# Altium PCB pcb.PcbDoc
Units mil, origin at the board's own origin, x right, y up, seen from the top; angles counter-clockwise.
Board outline 4330.71 x 2362.2 mil, 2 copper layers (Top Layer, Bottom Layer); 57 components, 43 nets, 209 pads, 55 vias.
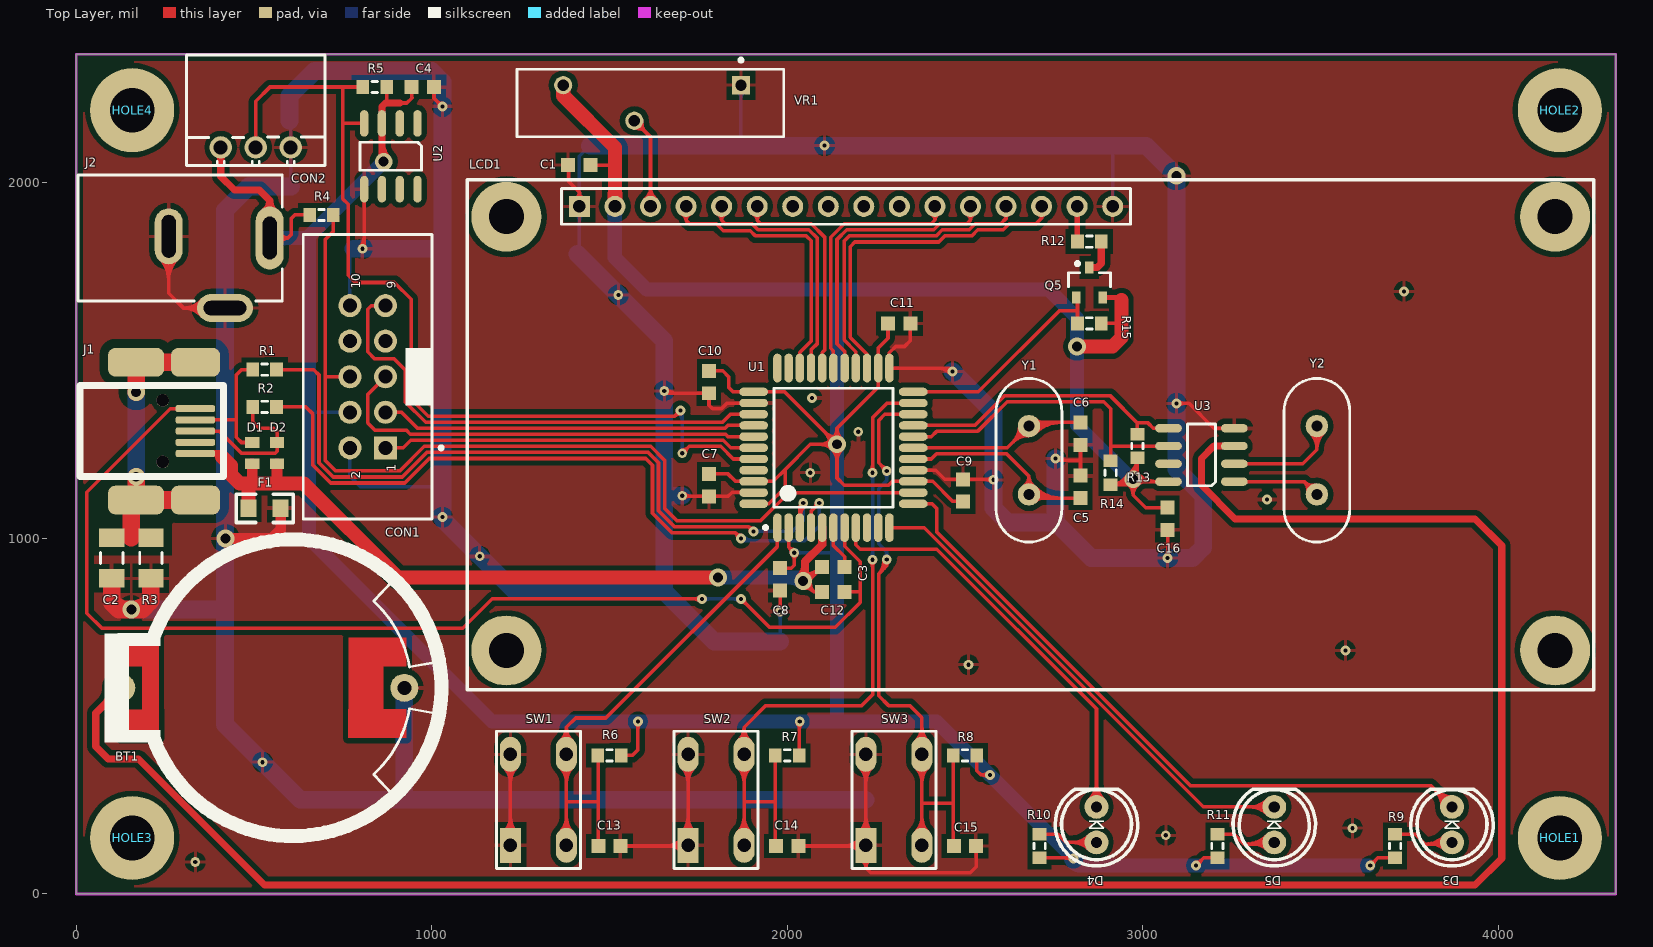
[diagram p0: Top Layer view]
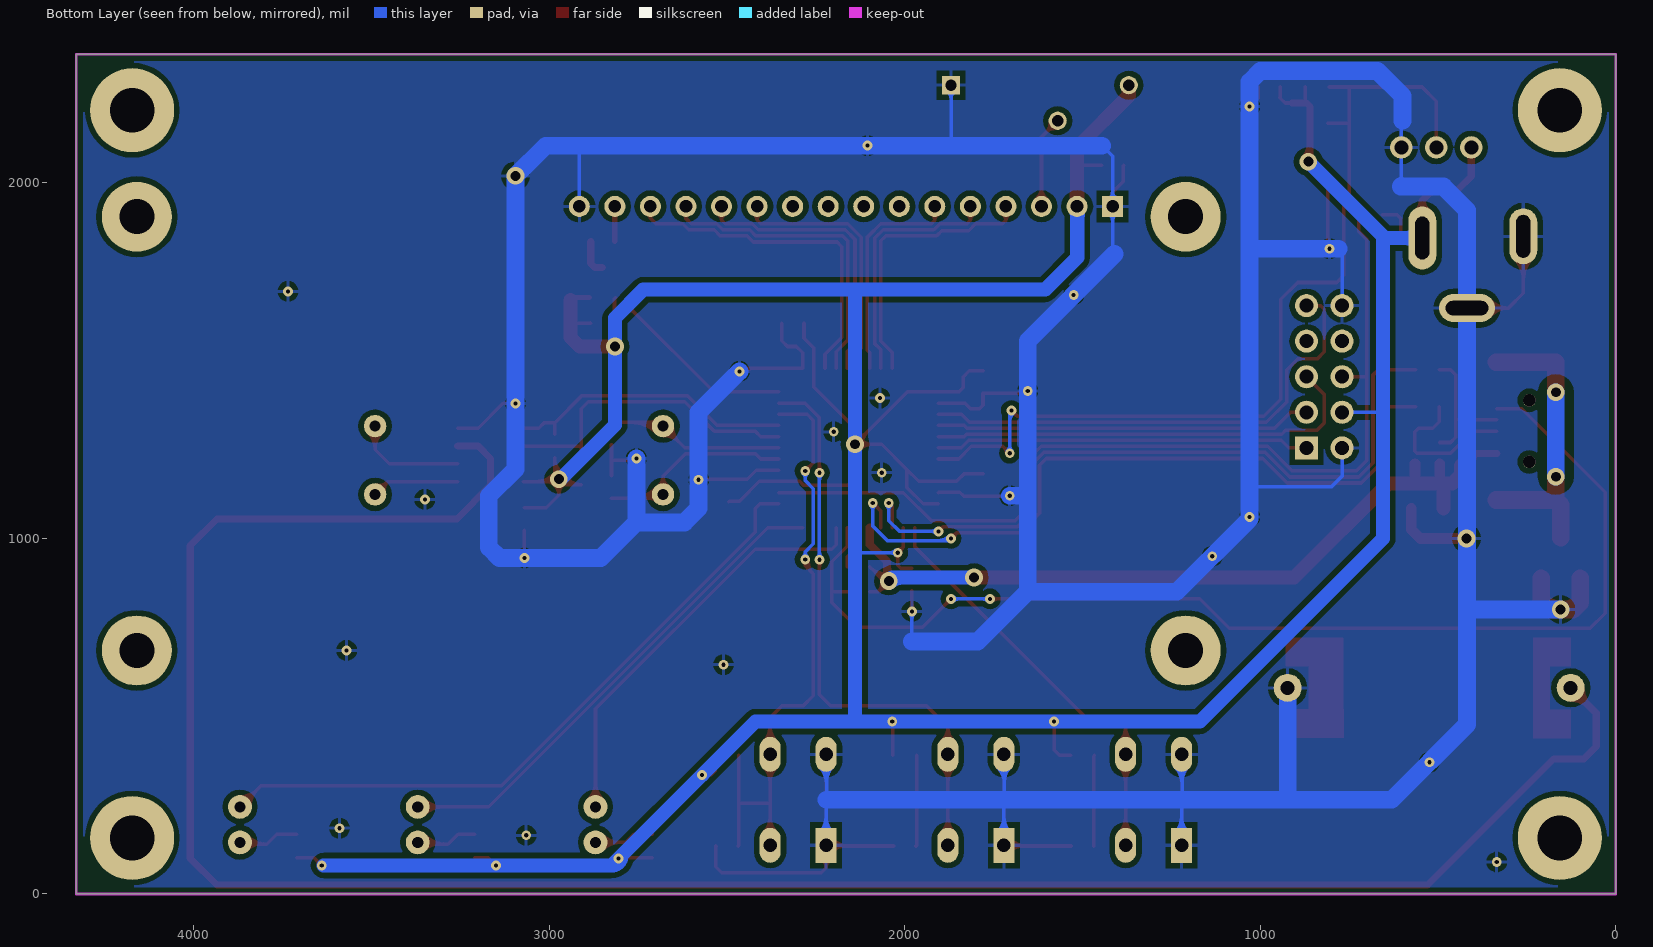
[diagram p1: Bottom Layer view, seen from below]

## Layer stack, top to bottom
Top Solder: solder mask 0.4, Solder Resist, Dk 3.5
Top Layer: signal copper 1.4
Dielectric 1: dielectric 12.6, FR-4, Dk 4.8
Bottom Layer: signal copper 1.4
Bottom Solder: solder mask 0.4, Solder Resist, Dk 3.5

## Board outline
0,0 0,2362.2 4330.71,2362.2 4330.71,0

## Design rules (kind name [scope] priority, off if disabled: settings)
Clearance shield2polygon [InNet('SHIELD')] p1: gap=25
Clearance polygons [InPolygon] p2: gap=15
Clearance [All] p3: gap=7
HoleSize [All] p1: absolutevalues=TRUE maxlimit=300 minlimit=1 maxpercent=80.000 minpercent=20.000
MinimumSolderMaskSliver [All] p1: minsoldermaskwidth=1
PlaneClearance [All] p1: clearance=10
PolygonConnect [All] p1: connectstyle=Relief reliefconductorwidth=10 reliefentries=4 polygonreliefangle="90 Angle" airgapwidth=15
RoutingVias [All] p1: holewidth=28 width=50 viastyle="Through Hole" minholewidth=28 minwidth=50 maxholewidth=28 maxwidth=50
SilkToBoardRegionClearance [All] p1 off:
SilkToSolderMaskClearance [IsPad] p1 off: minsilkscreentomaskgap=1 clearancetoexposedcopper=TRUE
SolderMaskExpansion [All] p1: expansion=4
UnpouredPolygon [All] p1: allowunpoured=FALSE
Width SHIELD [InNet('SHIELD')] p1: maxlimit=70 minlimit=50 preferedwidth=70
Width 12V [InNet('12V')] p2: maxlimit=40 minlimit=10 preferedwidth=30
Width GND [InNet('GND')] p3: maxlimit=70 minlimit=10 preferedwidth=70
Width 5V [InNet('5V')] p4: maxlimit=40 minlimit=10 preferedwidth=35
Width 24V [InNet('24V')] p5: maxlimit=70 minlimit=10 preferedwidth=70
Width [All] p6: maxlimit=40 minlimit=10 preferedwidth=10
24 further rules are at their usual default settings.

## Components (designator, comment, footprint, x,y, rotation, side; value= is the part's Value field where it differs from the comment)
BT1 "120591-1" TECO-120591-1-2_V 610,580 r180 top
C1 "100nF" CAPC1608N 1415,2050 r0 top
C2 "2n2" CAPC3216N 100,945 r90 top
C3 "1uF" CAPC1608N 2130,920 r0 top
C4 "100nF" CAPC1608N 975,2270 r180 top
C5 "15pF" CAPC1608N 2825,1145 r270 top
C6 "15pF" CAPC1608N 2825,1295 r90 top
C7 "100nF" CAPC1608N 1780,1150 r90 top
C8 "100nF" CAPC1608N 1980,885 r90 top
C9 "100nF" CAPC1608N 2495,1135 r270 top
C10 "100nF" CAPC1608N 1780,1440 r90 top
C11 "100nF" CAPC1608N 2315,1605 r180 top
C12 "100nF" CAPC1608N 2130,850 r0 top
C13 "100nF" CAPC1608N 1500,135 r180 top
C14 "100nF" CAPC1608N 2000,135 r180 top
C15 "100nF" CAPC1608N 2500,135 r180 top
C16 "100nF" CAPC1608N 3070,1055 r90 top
CON1 "Header 5X2" 918510X324 820,1455 r90 top
CON2 "MX-5268-03A" MX-5268-03 505,2100 r0 top
D1 "SURGX" SURGX-0603 495,1240 r90 top
D2 "SURGX" SURGX-0603 565,1240 r90 top
D3 "LED_GREEN" "LED 5mm Single Green" 3870,145 r90 top
D4 "LED_YELLOW" "LED 5mm Single Yellow" 2870,145 r90 top
D5 "LED_RED" "LED 5mm Single" 3370,145 r90 top
F1 "0.5A" SR050 575,1085 r180 top
HOLE1 "Mounting Hole" Hole3.2x6mm#1 4170,165 r0 top
HOLE2 "Mounting Hole" Hole3.2x6mm#2 4170,2210 r0 top
HOLE3 "Mounting Hole" Hole3.2x6mm#3 190,175 r0 top
HOLE4 "Mounting Hole" Hole3.2x6mm#4 130,2210 r0 top
J1 "67503-1020" MOLX-67503-1020_V 335,1365 r0 top
J2 "PWR2.5" KLD-0202 5,1845 r0 top
LCD1 "hd44780" HD44780 1100,575 r0 top locked
Q5 "AP2301" SOT95P230-3L 2850,1720 r90 top
R1 "22R" RESC1608N 530,1475 r0 top
R2 "22R" RESC1608N 530,1370 r0 top
R3 "10M" RESC3216N 210,945 r90 top
R4 "47k" RESC1608N 690,1910 r180 top
R5 "4.7k" RESC1608N 840,2270 r180 top
R6 "10k" RESC1608N 1500,390 r180 top
R7 "10k" RESC1608N 2000,390 r180 top
R8 "10k" RESC1608N 2500,390 r180 top
R9 "300R" RESC1608N 3710,135 r270 top
R10 "300R" RESC1608N 2710,135 r270 top
R11 "300R" RESC1608N 3210,135 r270 top
R12 "200R" RESC1608N 2850,1835 r0 top
R13 "2.2k" RESC1608N 2985,1260 r270 top
R14 "2.2k" RESC1608N 2910,1185 r270 top
R15 "3k" RESC1608N 2850,1605 r0 top
SW1 "DTSHW66NB" FSM2J 1300,265 r90 top
SW2 "DTSHW66NB" FSM2J 1800,265 r90 top
SW3 "DTSHW66NB" FSM2J 2300,265 r90 top
U1 "ATmega16U4RC-AU" 44ML_M 2130,1255 r90 top
U2 "DS18B20Z" SO-8_L 885,2075 r270 top
U3 "DS1307ZN+" SO-8_L 3165,1235 r180 top
VR1 "3006P-1-103ZLF" BOUR-3006P-3_V 1615,2225 r180 top
Y1 "16Mhz" HC-49U 2680,1220 r270 top
Y2 "32.768kHz" HC-49U 3490,1220 r90 top

## Footprints (in the part's own frame and the unit in brackets; to place one, negate y for a bottom-side part, rotate by r counter-clockwise, add the part's x,y. Pads: shape width x height; smd on the part's side, far side on the other; paste and mask are expansions set on the pad)
44ML_M [mm] "Thin QFP, 44-Leads, Body 10x10mm, Pitch 0.8mm, IPC Low Density"
  oval 2.05x0.6 smd: 1(-5.7,4) 2(-5.7,3.2) 3(-5.7,2.4) 4(-5.7,1.6) 5(-5.7,0.8) 6(-5.7,0) 7(-5.7,-0.8) 8(-5.7,-1.6) 9(-5.7,-2.4) 10(-5.7,-3.2) 11(-5.7,-4) 23(5.7,-4) 24(5.7,-3.2) 25(5.7,-2.4) 26(5.7,-1.6) 27(5.7,-0.8) 28(5.7,0) 29(5.7,0.8) 30(5.7,1.6) 31(5.7,2.4) 32(5.7,3.2) 33(5.7,4)
  oval 0.6x2.05 smd: 12(-4,-5.7) 13(-3.2,-5.7) 14(-2.4,-5.7) 15(-1.6,-5.7) 16(-0.8,-5.7) 17(0,-5.7) 18(0.8,-5.7) 19(1.6,-5.7) 20(2.4,-5.7) 21(3.2,-5.7) 22(4,-5.7) 34(4,5.7) 35(3.2,5.7) 36(2.4,5.7) 37(1.6,5.7) 38(0.8,5.7) 39(0,5.7) 40(-0.8,5.7) 41(-1.6,5.7) 42(-2.4,5.7) 43(-3.2,5.7) 44(-4,5.7)
  silkscreen extent -5.82,-4.25 4.25,4.97, body extent -6,-6 6,6, height 1.08
918510X324 [mm] "Connector; IDC, Low Profile Male Header, Thru-Hole; 10 Position; Vertical; Pitch 2.54 mm; Body 20.32 x 9.2 x 9.45 mm (LxWxH)"
  rect 1.65x1.65 hole 1: 1(-5.08,-1.27)
  round 1.65 hole 1: 2(-5.08,1.27) 3(-2.54,-1.27) 4(-2.54,1.27) 5(0,-1.27) 6(0,1.27) 7(2.54,-1.27) 8(2.54,1.27) 9(5.08,-1.27) 10(5.08,1.27)
  silkscreen extent -10.16,-5.38 10.16,4.6, body extent -10.16,-4.57 10.16,4.57, height 9.86
BOUR-3006P-3_V [mm] "THD, 3-Leads, Body 19.05x4.83mm, Height 6.6mm"
  rect 1.3x1.3 hole 0.8: 1(-6.475,-1.27)
  round 1.3 hole 0.8: 2(1.145,1.27) 3(6.225,-1.27)
  silkscreen extent -9.53,-3.19 9.53,2.41, body extent -9.53,-2.41 11.05,2.41, height 6.6
CAPC1608N [mm] "Chip Capacitor, Body 1.6x0.8mm, IPC Medium Density"
  rect 1x1 smd: 1(-0.8,0) 2(0.8,0)
  body extent -0.8,-0.4 0.8,0.4, height 0.3
CAPC3216N [mm] "Chip Capacitor, Body 3.2x1.6mm, IPC Medium Density"
  rect 1.3x1.8 smd: 1(-1.45,0) 2(1.45,0)
  silkscreen extent -0.4,-0.8 0.4,0.8, body extent -1.6,-0.84 1.6,0.76, height 1
FSM2J [mm]
  rect 2.5x1.5 hole 0.95: 1(-3.25,2)
  oval 2.5x1.5 hole 0.95: 1(3.25,2) 2(-3.25,-2) 2(3.25,-2)
  silkscreen extent -4.9,-3 4.9,3, body extent -4.13,-3.3 4.13,3.2, height 7
HC-49U [mm] "Quartz Crystal, Thru-Hole; 2 Leads; Body 11.35 x 4.65 x 13.46 mm (LxWxH max)"
  round 1.6 hole 0.8: 1(-2.44,0) 2(2.44,0)
  silkscreen extent -5.85,-2.35 5.85,2.35, body extent -5.67,-2.3 5.68,2.35, height 3.6
HD44780 [mm] "Connector; Header; 16 Position"
  round 5 hole 2.5: 0(2.794,2.794) 0(2.794,33.782) 0(77.724,2.794) 0(77.724,33.782)
  rect 1.5x1.5 hole 0.9: 1(8.013,34.521)
  round 1.5 hole 0.9: 2(10.553,34.521) 3(13.093,34.521) 4(15.633,34.521) 5(18.173,34.521) 6(20.713,34.521) 7(23.253,34.521) 8(25.793,34.521) 9(28.333,34.521) 10(30.873,34.521) 11(33.413,34.521) 12(35.953,34.521) 13(38.493,34.521) 14(41.033,34.521) 15(43.573,34.521) 16(46.113,34.521)
  silkscreen extent 0,0 80.5,36.43, body extent 0,0 80.5,36.5, height 17.52
Hole3.2x6mm#1 [mm] "Mounting Hole"
  round 6 hole 3.2: 0(0.082,-0.191)
  body extent -0.1,-0.1 0.1,0.1
Hole3.2x6mm#2 [mm] "Mounting Hole"
  round 6 hole 3.2: 0(0.082,-0.134)
  body extent -0.1,-0.1 0.1,0.1
Hole3.2x6mm#3 [mm] "Mounting Hole"
  round 6 hole 3.2: 0(-0.826,-0.445)
  body extent -0.1,-0.1 0.1,0.1
Hole3.2x6mm#4 [mm] "Mounting Hole"
  round 6 hole 3.2: 0(0.698,-0.134)
  body extent -0.1,-0.1 0.1,0.1
KLD-0202 [mm] "DC Power Jack, 2.5mm, KLD Series, PCB Mount"
  oval 2x4.5 hole 1.016 slot 3.048 at 90 deg: 1(13.7,0)
  oval 2x4 hole 1.016 slot 3.048 at 90 deg: 2(6.484,0.127)
  oval 4x2 hole 1.016 slot 3.048 at 0 deg: 3(10.5,-5)
  silkscreen extent 0,-4.5 14.6,4.5, body extent 0.01,-5.25 14.21,4.44, height 10.75
"LED 5mm Single" [mm]
  round 1.7 hole 0.8: 1(0,0)
  round 1.7 hole 0.8 paste+0: 2(2.54,0)
  silkscreen extent -1.68,-2.95 3.8,2.95, body extent -1.71,-3.01 3.71,3.01, height 12.31
"LED 5mm Single Green" [mm]
  round 1.7 hole 0.8: 1(0,0)
  round 1.7 hole 0.8 paste+0: 2(2.54,0)
  silkscreen extent -1.68,-2.95 3.8,2.95, body extent -1.71,-3.01 3.71,3.01, height 12.31
"LED 5mm Single Yellow" [mm]
  round 1.7 hole 0.8: 1(0,0)
  round 1.7 hole 0.8 paste+0: 2(2.54,0)
  silkscreen extent -1.68,-2.95 3.8,2.95, body extent -1.71,-3.01 3.71,3.01, height 12.31
MOLX-67503-1020_V [mm] "Mini USB Connector, SMT, Righer Angle"
  rrect50% 2.8x0.5 smd: 1(0,0) 2(0,-0.8) 3(0,-1.6) 4(0,-2.4) 5(0,-3.2)
  rrect50% 3.5x2.05 smd: 6(0.025,3.325) 8(0.025,-6.525)
  rrect50% 4x2.05 smd: 7(-4.225,3.325) 9(-4.225,-6.525)
  round 0.9 hole 0.9 unplated: X(-2.325,-3.8) Y(-2.325,0.6)
  silkscreen extent -8.25,-4.85 2,1.65, body extent -8.21,-6.55 0.79,3.35, height 4
MX-5268-03 [mm] "2.50mm (.098\") Pitch SPOX™ Wire-to-Board Header"
  round 1.6 hole 1: 1(-2.5,0) 2(0,0) 3(2.5,0)
  silkscreen extent -4.95,-1.3 4.95,6.6, body extent -4.95,-0.25 4.95,6.6, height 4.9
RESC1608N [mm] "Chip Resistor, Body 1.6x0.8mm, IPC Medium Density"
  rect 0.9x1 smd: 1(-0.85,0) 2(0.85,0)
  silkscreen extent -0.2,-0.4 0.2,0.4, body extent -0.8,-0.4 0.8,0.4, height 0.3
RESC3216N [mm] "Chip Resistor, Body 3.2x1.6mm, IPC Medium Density"
  rect 1.3x1.8 smd: 1(-1.45,0) 2(1.45,0)
  silkscreen extent -0.4,-0.8 0.4,0.8, body extent -1.6,-0.8 1.6,0.8, height 0.55
SO-8_L [mm] "8-Pin Small Outline Integrated Circuit 1.27 mm Pitch, IPC High Density"
  oval 1.9x0.6 smd: 1(-2.35,1.905) 2(-2.35,0.635) 3(-2.35,-0.635) 4(-2.35,-1.905) 5(2.35,-1.905) 6(2.35,-0.635) 7(2.35,0.635) 8(2.35,1.905)
  silkscreen extent -1,-2.2 1,2.2, body extent -3.17,-2.5 3.17,2.5, height 1.88
SOT95P230-3L [mm] "SOT23, 3-Leads, Body 2.9x1.3mm, Pitch 0.95mm, Lead Span 2.3mm - Alternate Lead Configuration, IPC High Density"
  rect 0.85x0.6 smd: 1(1.075,0) 2(-1.075,0.95) 3(-1.075,-0.95)
  silkscreen extent -0.3,-1.5 1.47,1.5, body extent -1.25,-1.5 1.25,1.5, height 1.05
SR050 [mil] "0805 fuse"
  rect 45x50 smd: 1(0,0) 2(90,0)
  silkscreen extent -35,-40 125,40, body extent 7,-24 85,24, height 19
SURGX-0603 [mil] "Suppressor diode"
  rect 30x40 smd: 1(-30,0) 2(30,0)
  body extent -31,-16 32,16, height 35
TECO-120591-1-2_V [mm] "Lithium Battery Holder"
  round 2 hole 1: 1(12.275,0) 2(-7.95,0)
  Top Layer region: 10.802,3.591 9.577,3.591 9.577,-3.609 10.802,-3.609
  Top Layer region: 9.577,-1.534 9.577,-3.609 12.302,-3.609 12.302,-1.534
  Top Layer region: 12.298,1.534 12.298,3.609 9.573,3.609 9.573,1.534
  Top Layer region: -8.109,-1.527 -8.109,-3.602 -3.959,-3.602 -3.959,-1.527
  Top Layer region: -3.941,1.527 -3.941,3.602 -8.091,3.602 -8.091,1.527
  Top Layer region: -6.475,-3.6 -3.95,-3.6 -3.95,3.6 -6.475,3.6
  silkscreen extent -10.6,-10.6 13.47,10.6, body extent -10.62,-10.59 13.17,10.63, height 10

## Part data
BT1: library part CMP-0438-00001-1, "Lithium Battery Holder for CR2032 3V Cell"
C1 C2 C3 C4 C5 C6 C7 C8 C9 C10 C11 C12 C13 C14 C15 C16: library part Capacitor, "Capacitor"
CON1: "Header, 5-Pin, Dual row"
CON2: library part "Header 3", "Header, 3-Pin"
D1 D2: "ESD Suppressor"
F1: library part SR050, "SR050"
HOLE1 HOLE2 HOLE3 HOLE4: library part "HOLE M3"
J1: library part CMP-0411-00002-1, "USB, MINI, SMD, RA KME04-USBMU03A01"
J2: "Low Voltage Power Supply Connector"
Q5: library part AP2301AGN
R1 R2 R3 R4 R5 R6 R7 R8 R9 R10 R11 R12 R13 R14 R15: library part Resistor, "Resistor"
SW1 SW2 SW3: "SWITCH, SPNO TACT"
U1: library part CMP-0095-00572-1, "8-bit AVR Microcontroller, 2.7-5.5V, 16MHz, 16KB Flash, 512 Bytes EEPROM, 1.25KB SRAM, USB Controller, 44-pin TQFP, Industrial Grade (-40°C to 85°C), Int RC"
U2: library part CMP-0253-00023-2, "High-Precision 1-Wire Digital Thermometer, -55 to 125 degC, 8-Pin SOIC (S8-2)"
U3: library part CMP-0254-00324-1, "64 x 8, Serial, I2C Real-Time Clock, 5.0V, 8-Pin SO, -40 to 85 degC, Pb-Free"
VR1: library part CMP-0975-00014-1, "Trimming Potentiometer, 10K Ohm +/- 10%, -55 to 125 degC, 3-Pin 19.05 x 4.83 x 6.6 mm THD, RoHS"
Y1 Y2: library part XTAL, "Crystal Oscillator"

## Via types
v1: diameter 27.56, hole 11.81, Top Layer to Bottom Layer, 44 vias
v2: diameter 50, hole 28, Top Layer to Bottom Layer, 11 vias

## Nets (pads, with @x,y where several pads share a name; then routed paths per layer and width w, separated by ;. In a path a pad name is that pad's centre, name@x,y a point inside that pad or via, vN(x,y) a via of type N, cw(c..) or ccw(c..) an arc to the next point about the centre after c; other vN are vias at no path point)
1WIRE: CON2.2 R5.2 U1.40 U2.4 | length 2790.8
  Top Layer w10: CON2.2 505,2230 545,2270 750,2270 ; R5.2 750,2270 ; U2.4 752.48,2167.52 750,2170 ; v1@1691.22,1360 cw(c1670.02,1360) 1685.01,1345.01 cw(c1700,1330.02) v1@1700,1351.22 ; v1(1700,1360) 1684,1344 990.04,1344 942,1392.04 942,1673 895,1720 785,1720 765,1740 765,1940 750,1955 750,2170 ; v1(1705,1240) 1724,1259 1812.92,1259 1848.41,1223.5 U1.40 ; v1@1705,1248.78 ccw(c1705,1269.98) 1719.99,1254.99 ccw(c1734.98,1240) v1@1713.78,1240 ; 750,2170 750,2270
  Bottom Layer w10: v1@1693.79,1353.79 cw(c1666.73,1326.73) 1705,1326.73 ; v1@1698.79,1246.21 ccw(c1683.8,1261.2) 1705,1261.2 ccw(c1726.2,1261.2) v1@1711.21,1246.21 ; v1(1700,1360) 1705,1355 v1(1705,1240)
5V: C1.2 C4.2 C7.2 C8.2 C9.2 C10.2 C11.2 C16.2 CON1.4 CON2.1 J2.1 LCD1.2 Q5.3 R4.2 R5.1 R6.1 R7.1 R8.1 R9.2 R10.2 R11.2 R13.2 R14.2 R15.2 U1.2 U1.14 U1.24 U1.34 U1.42 U1.44 U2.3 U3.8 VR1.3 | length 14140.1
  Top Layer w10: J2.1 595,1845 ; J2.1@576.31,1832.32 cw(c595,1824.9) 595,1845 ; J2.1@576.31,1857.68 ccw(c595,1865.1) 595,1845 ; R4.2 615,1910 605,1900 605,1855 595,1845 ; 870,2225 873.46,2228.46 R5.1 ; 910,2225 930,2225 945,2240 943.5,2241.5 C4.2 ; C1.2 1515.47,2050 ; R6.1 1565,390 1580,405 v1(1580,485) ; v1@1573.79,478.79 cw(c1558.8,463.8) 1580,463.8 cw(c1601.2,463.8) v1@1586.21,478.79 ; C7.2 1833.5,1181.5 1854.49,1160.51 U1.42 1960.51,1160.51 1995,1195 ; C10.2 1818.5,1471.5 1835,1455 1835,1425 1847.52,1412.48 U1.34 1992.52,1412.48 v2(2140,1265) ; U1.44 1948.48,1097.52 1995,1144.04 1995,1195 ; C8.2 2011.5,916.5 2020,925 v1(2020,960) 2004.02,975.98 U1.2 ; v1@2011.22,960 ccw(c1990.02,960) 2005.01,974.99 ccw(c2020,989.98) v1@2020,968.78 ; v1@2013.79,953.79 cw(c1998.8,938.8) 2020,938.8 cw(c2041.2,938.8) v1@2026.21,953.79 ; v1@2028.79,478.79 cw(c2017.51,467.51) 2033.46,467.51 ; R7.1 2033.46,483.46 v1(2035,485) ; 2033.46,460.1 cw(c2059.9,460.1) v1@2041.21,478.79 ; v2@2120,1265 ccw(c2071.72,1265) 2105.86,1299.14 ccw(c2140,1333.28) v2@2140,1285 ; v2@2125.86,1279.14 cw(c2091.72,1313.28) 2091.72,1265 cw(c2091.72,1216.72) 2125.86,1250.86 cw(c2091.72,1216.72) 2140,1216.72 cw(c2188.28,1216.72) v2@2154.14,1250.86 ; v2@2126.6,1279.85 ccw(c2099.38,1310) 2140,1310 ; v2@2153.4,1279.85 cw(c2180.62,1310) 2140,1310 ; C11.2 2283.5,1563.5 2255.98,1535.98 U1.24 2255.98,1425.98 2140,1310 ; C9.2 2493.5,1105 2465,1105 2409.49,1160.51 U1.14 2295.51,1160.51 2285,1150 2160,1150 2140,1170 v2(2140,1265) ; R8.1 2533.46,346.54 2545,335 v1(2570,335) ; v1@2563.79,328.79 ccw(c2548.8,313.8) 2548.8,335 ccw(c2548.8,356.2) v1@2563.79,341.21 ; R10.2 2803.46,101.54 v1(2805,100) ; 2780.1,101.54 cw(c2780.1,75.1) v1@2798.79,93.79 ; 2787.51,101.54 ccw(c2787.51,117.49) v1@2798.79,106.21 ; R15.2@2885,1606.54 R15.2 2940,1605 ; R14.2@2927.98,1151.54 ccw(c2927.98,1194.84) v2@2964.77,1172.01 ; 2945.95,1151.54 ccw(c2945.95,1183.68) v2(2973.27,1166.73) ; v2@2956.27,1177.28 cw(c2910,1205.99) R14.2 2958.07,1151.54 v2(2973.27,1166.73) ; v2@2959.87,1151.89 cw(c2932.65,1121.73) 2973.27,1121.73 ; v2@2962.06,1183.29 ccw(c2932.79,1226.53) R13.2 2985,1178.46 v2(2973.27,1166.73) ; v2@2967.66,1175.01 ccw(c2945.54,1207.69) 2985,1207.69 ; v2@2980.34,1173.8 ccw(c3013.66,1207.13) 3013.66,1160 ; 2985,1188.84 cw(c2958.3,1188.84) v2(2973.27,1166.73) ; v2@2986.67,1151.89 ccw(c3013.89,1121.73) 2973.27,1121.73 ; v2@2987.41,1152.59 cw(c3005.3,1134.7) 3005.3,1160 ; v2@2987.41,1180.87 ccw(c3037.8,1231.27) U3.8@3037.8,1160 ; C16.2 3008.5,1086.5 2973.27,1121.73 ; U3.8 2980,1160 v2(2973.27,1166.73) ; v1(3150,80) 3171.54,101.54 R11.2 ; v1@3150,88.78 ccw(c3150,109.98) 3164.99,94.99 ccw(c3179.98,80) v1@3158.78,80 ; v1(3640,80) 3661.54,101.54 R9.2 ; v1@3640,88.78 ccw(c3640,109.98) 3654.99,94.99 ccw(c3669.98,80) v1@3648.78,80 ; 1995,1195 2065,1265 v2(2140,1265) ; v2(2140,1265) 2140,1310 ; 2973.27,1121.73 v2(2973.27,1166.73)
  Top Layer w15: Q5.3 2932.32,1677.68 2940,1670
  Top Layer w20: CON2.1 406.57,2018.43 445,1980 515,1980 544.37,1950.63 ; J2.1@527.53,1918.27 ccw(c504.87,1950.63) 544.37,1950.63 ; J2.1 544.37,1950.63 ; J2.1@561.21,1918.27 cw(c583.87,1950.63) 544.37,1950.63 ; 860,2108.28 ccw(c913.28,2108.28) v2@875.61,2070.61 ; v2(865,2060) 860,2065 U2.3 860,2215 870,2225 910,2225
  Top Layer w40: VR1.3 1369.92,2245.08 1515.47,2099.53 1515.47,2050 LCD1.2 ; v2(2815,1540) 2915,1540 2940,1565 2940,1605 2940,1670
  Bottom Layer w10: 655,1350 660,1355 CON1.4 ; v1(2020,960) 2140,960 ; v1@2026.21,953.79 cw(c2041.2,938.8) 2041.2,960 cw(c2041.2,981.2) v1@2026.21,966.21
  Bottom Layer w40: J2.1 650,1845 ; J2.1@558.07,1831.3 cw(c591.13,1798.24) 591.13,1845 cw(c591.13,1891.76) J2.1@558.07,1858.7 ; v2(865,2060) 650,1845 ; LCD1.2 1515,1933.63 1515,1790 1605,1700 2140,1700 ; v1@2799.19,97.78 ccw(c2825,107.62) 2825,80 ; v1@2800.6,95.6 ccw(c2838.27,133.27) 2838.27,80 ; v2@2970,1165 2815.47,1319.53 2815.47,1620 2735.47,1700 2140,1700 ; v1@3635,80 v1(3150,80) 2825,80 ; 650,1845 655,1840 655,1350 655,1000 1170,485 v1(1580,485) v1(2035,485) 2140,485 ; 2140,485 2140,960 v2(2140,1265) 2140,1700 ; 2140,485 2420,485 v1(2570,335) v1(2805,100) 2825,80
#RST: CON1.6 R4.1 U1.13 | length 2663.5
  Top Layer w10: R4.1 723.46,1863.46 700,1840 700,1455 ; CON1.6 700,1455 ; U1.13 2004.02,1129.02 1925,1050 1690,1050 1655,1085 1655,1220 1616,1259 979,1259 910,1190 730,1190 700,1220 700,1455
BTN1: C13.2 R6.2 SW1.2 U1.1 | length 1969.1
  Top Layer w10: SW1.2@1361.4,174.08 ccw(c1319.53,215.95) 1378.74,215.95 ccw(c1437.95,215.95) SW1.2@1396.08,174.08 ; SW1.2@1361.4,355.92 cw(c1319.53,314.05) 1378.74,314.05 cw(c1437.95,314.05) SW1.2@1396.08,355.92 ; SW1.2@1362.08,430.64 ccw(c1326.85,468.74) 1378.74,468.74 ; SW1.2@1368.47,167 ccw(c1343.67,191.8) 1378.74,191.8 ccw(c1413.81,191.8) SW1.2@1389.01,167 ; SW1.2@1368.47,363 cw(c1343.67,338.2) 1378.74,338.2 cw(c1413.81,338.2) SW1.2@1389.01,363 ; SW1.2@1368.88,423.3 ccw(c1348,445.87) 1378.74,445.87 ccw(c1409.48,445.87) SW1.2@1388.6,423.3 ; SW1.2@1378.74,137.05 1378.74,260 ; SW1.2@1395.4,430.64 cw(c1430.63,468.74) 1378.74,468.74 ; R6.2 1468.5,388.03 1468.5,260 ; C13.2 1468.5,260 ; U1.1 1972.52,977.52 1490,495 1405,495 1378.74,468.74 ; 1378.74,260 1378.74,392.95 1378.74,468.74 ; 1378.74,260 1468.5,260
  Bottom Layer w10: SW1.2@1378.74,392.95 SW1.2@1380,394.21
BTN2: C14.2 R7.2 SW2.2 U1.21 | length 2553.1
  Top Layer w10: SW2.2@1861.4,174.08 ccw(c1819.53,215.95) 1878.74,215.95 ccw(c1937.95,215.95) SW2.2@1896.08,174.08 ; SW2.2@1861.4,355.92 cw(c1819.53,314.05) 1878.74,314.05 cw(c1937.95,314.05) SW2.2@1896.08,355.92 ; SW2.2@1862.08,430.64 ccw(c1826.85,468.74) 1878.74,468.74 ; SW2.2@1868.47,167 ccw(c1843.67,191.8) 1878.74,191.8 ccw(c1913.81,191.8) SW2.2@1889.01,167 ; SW2.2@1868.47,363 cw(c1843.67,338.2) 1878.74,338.2 cw(c1913.81,338.2) SW2.2@1889.01,363 ; SW2.2@1868.88,423.3 ccw(c1848,445.87) 1878.74,445.87 ccw(c1909.48,445.87) SW2.2@1888.6,423.3 ; SW2.2@1878.74,137.05 1878.74,260 ; SW2.2@1895.4,430.64 cw(c1930.63,468.74) 1878.74,468.74 ; R7.2 1966.54,260 ; C14.2 1966.54,136.97 1966.54,260 ; v1@2233.79,933.79 cw(c2218.8,918.8) 2240,918.8 cw(c2261.2,918.8) v1@2246.21,933.79 ; v1@2233.79,1191.21 ccw(c2218.8,1206.2) 2240,1206.2 ccw(c2261.2,1206.2) v1@2246.21,1191.21 ; v1(2240,940) 2240,560 2210,530 1940,530 1878.74,468.74 ; v1(2240,1185) 2240,1340 2280.98,1380.98 U1.21 ; 1878.74,260 1878.74,392.95 1878.74,468.74 ; 1878.74,260 1966.54,260
  Bottom Layer w10: SW2.2@1878.74,392.95 SW2.2@1880,394.21 ; v1@2233.79,946.21 ccw(c2218.8,961.2) 2240,961.2 ccw(c2261.2,961.2) v1@2246.21,946.21 ; v1@2233.79,1178.79 cw(c2218.8,1163.8) 2240,1163.8 cw(c2261.2,1163.8) v1@2246.21,1178.79 ; v1(2240,940) v1(2240,1185)
BTN3: C15.2 R8.2 SW3.2 U1.20 | length 2409.9
  Top Layer w10: v1@2271.22,1190 ccw(c2250.02,1190) 2265.01,1204.99 ccw(c2280,1219.98) v1@2280,1198.78 ; v1@2271.27,940.11 cw(c2221.94,935.06) 2257,900 ; 2271.88,914.88 ccw(c2248.94,937.82) v1@2281.21,941.12 ; v1@2274.6,934.08 cw(c2265.94,923) 2280,923 ; v1(2280,941) 2280,923 ; v1(2280,1190) 2257,1213 2257,1332 2274.49,1349.49 U1.20 ; v1@2285.4,934.08 ccw(c2294.06,923) 2280,923 ; SW3.2@2361.4,174.08 ccw(c2319.53,215.95) 2378.74,215.95 ccw(c2437.95,215.95) SW3.2@2396.08,174.08 ; SW3.2@2361.4,355.92 cw(c2319.53,314.05) 2378.74,314.05 cw(c2437.95,314.05) SW3.2@2396.08,355.92 ; SW3.2@2361.4,429.98 ccw(c2319.53,471.85) 2378.74,471.85 ccw(c2437.95,471.85) SW3.2@2396.08,429.98 ; SW3.2@2368.47,167 ccw(c2343.67,191.8) 2378.74,191.8 ccw(c2413.81,191.8) SW3.2@2389.01,167 ; SW3.2@2368.47,363 cw(c2343.67,338.2) 2378.74,338.2 cw(c2413.81,338.2) SW3.2@2389.01,363 ; SW3.2@2368.47,422.91 ccw(c2343.67,447.71) 2378.74,447.71 ccw(c2413.81,447.71) SW3.2@2389.01,422.91 ; SW3.2@2378.74,137.05 2378.74,255 ; R8.2 2466.54,255 ; C15.2 2466.54,136.97 2466.54,255 ; 2257,900 2257,558 2285,530 2345,530 2378.74,496.26 2378.74,392.95 2378.74,255 ; 2257,900 2280,923 ; 2378.74,255 2466.54,255
  Bottom Layer w10: v1@2273.79,1183.79 cw(c2258.8,1168.8) 2280,1168.8 cw(c2301.2,1168.8) v1@2286.21,1183.79 ; v1@2273.83,947.25 ccw(c2259.28,962) 2280,962 ; v1@2280,940 v1(2280,941) 2280,962 ; v1(2280,1190) 2280,1163 2257,1140 2257,985 2280,962 ; v1@2286.17,947.25 cw(c2300.72,962) 2280,962
GND: BT1.2 C1.1 C2.1 C4.1 C5.1 C6.1 C7.1 C8.1 C9.1 C10.1 C11.1 C13.1 C14.1 C15.1 C16.1 CON1.2 CON1.10 CON2.3 F1.1 J2.2 J2.3 LCD1.1 LCD1.16 R3.1 SW1.1 SW2.1 SW3.1 U1.15 U1.23 U1.35 U1.43 U2.5 U3.4 VR1.1 | length 22037.3
  Top Layer w10: J2.2@235.97,1786.33 cw(c177.96,1728.32) 260,1728.32 ; J2.2@243.04,1793.4 cw(c202.11,1752.46) 260,1752.46 ; 260,1726.99 cw(c343.92,1726.99) J2.2@284.58,1786.33 ; 260,1751.13 cw(c319.78,1751.13) J2.2@277.51,1793.4 ; J2.2 260,1849.72 260,1690 301.85,1648.15 ; J2.3@353.47,1625.16 ccw(c301.85,1578.72) 301.85,1648.15 ; J2.3@353.47,1671.14 cw(c301.85,1717.58) 301.85,1648.15 ; J2.3@360.9,1631.85 ccw(c324.3,1598.92) 324.3,1648.15 ccw(c324.3,1697.38) J2.3@360.9,1664.45 ; J2.3 301.85,1648.15 ; v1@798.79,1821.21 ccw(c771.73,1848.27) 810,1848.27 ; v1(805,1815) 810,1820 U2.5 ; C4.1 1006.5,2238.5 v1(1030,2215) ; v1@1021.22,2215 ccw(c1000.02,2215) 1015.01,2229.99 ccw(c1030,2244.98) v1@1030,2223.78 ; SW1.1@1203.92,174.08 ccw(c1162.05,215.95) 1221.26,215.95 ccw(c1280.47,215.95) SW1.1@1238.6,174.08 ; SW1.1@1203.92,355.92 cw(c1162.05,314.05) 1221.26,314.05 cw(c1280.47,314.05) SW1.1@1238.6,355.92 ; SW1.1@1210.99,167 ccw(c1186.19,191.8) 1221.26,191.8 ccw(c1256.33,191.8) SW1.1@1231.53,167 ; SW1.1@1210.99,363 cw(c1186.19,338.2) 1221.26,338.2 cw(c1256.33,338.2) SW1.1@1231.53,363 ; SW1.1@1221.26,137.05 SW1.1@1221.26,392.95 ; C1.1 1385,2048.5 1385,2005 1415.47,1974.53 LCD1.1 LCD1.1@1415,1934.57 ; C13.1 1719.21,135 1721.26,137.05 SW2.1@1721.26,392.95 ; v1@1653.36,1414.14 ccw(c1666.96,1427.74) 1666.96,1408.5 ; v1(1654.22,1415) 1660.72,1408.5 C10.1 1780,1375 1790,1365 1815,1365 1830.98,1380.98 U1.35 ; 1657.1,135 ccw(c1657.1,201.2) SW2.1@1703.92,154.39 ; v1@1660.43,1421.21 ccw(c1691.1,1451.88) 1691.1,1408.5 ; 1666.99,135 cw(c1666.99,82.78) SW2.1@1703.92,119.7 ; 1681.24,135 ccw(c1681.24,177.06) SW2.1@1710.99,147.32 ; 1691.13,135 cw(c1691.13,106.92) SW2.1@1710.99,126.77 ; SW2.1@1703.92,174.08 ccw(c1662.05,215.95) 1721.26,215.95 ccw(c1780.47,215.95) SW2.1@1738.6,174.08 ; SW2.1@1703.92,355.92 cw(c1662.05,314.05) 1721.26,314.05 cw(c1780.47,314.05) SW2.1@1738.6,355.92 ; v1(1705,1120) 1706.5,1118.5 C7.1 1833.5,1118.5 1845,1130 1904.61,1130 U1.43 ; SW2.1@1710.99,167 ccw(c1686.19,191.8) 1721.26,191.8 ccw(c1756.33,191.8) SW2.1@1731.53,167 ; SW2.1@1710.99,363 cw(c1686.19,338.2) 1721.26,338.2 cw(c1756.33,338.2) SW2.1@1731.53,363 ; v1@1711.21,1113.79 cw(c1722.58,1102.42) 1722.58,1118.5 ; v1@1711.21,1126.21 ccw(c1729.81,1144.81) 1729.81,1118.5 ; v1@1973.79,801.21 ccw(c1958.8,816.2) 1980,816.2 ccw(c2001.2,816.2) v1@1986.21,801.21 ; v1(1980,795) C8.1 ; C14.1 2219.21,135 SW3.1@2221.26,137.05 ; 2157.1,135 ccw(c2157.1,201.2) SW3.1@2203.92,154.39 ; 2166.99,135 cw(c2166.99,82.78) SW3.1@2203.92,119.7 ; 2181.24,135 ccw(c2181.24,177.06) SW3.1@2210.99,147.32 ; 2191.13,135 cw(c2191.13,106.92) SW3.1@2210.99,126.77 ; SW3.1@2203.92,174.08 ccw(c2162.05,215.95) 2221.26,215.95 ccw(c2280.47,215.95) SW3.1@2238.6,174.08 ; SW3.1@2203.92,355.92 cw(c2162.05,314.05) 2221.26,314.05 cw(c2280.47,314.05) SW3.1@2238.6,355.92 ; SW3.1@2208.52,96.4 cw(c2194.74,73.74) 2221.26,73.74 ; SW3.1@2210.99,167 ccw(c2186.19,191.8) 2221.26,191.8 ccw(c2256.33,191.8) SW3.1@2231.53,167 ; SW3.1@2210.99,363 cw(c2186.19,338.2) 2221.26,338.2 cw(c2256.33,338.2) SW3.1@2231.53,363 ; SW3.1@2221.26,392.95 SW3.1@2221.26,137.05 ; SW3.1@2234,96.4 ccw(c2247.78,73.74) 2221.26,73.74 ; C11.1 2346.5,1556.5 2330,1540 2305,1540 2287.48,1522.48 U1.23 2455.59,1479.41 v1(2465,1470) ; U1.15 2417.99,1192.01 2443.5,1166.5 C9.1 2578.5,1166.5 v1(2580,1165) ; 2421.09,1479.41 cw(c2421.09,1426.09) v1@2458.79,1463.79 ; 2445.23,1479.41 cw(c2445.23,1450.23) v1@2465.86,1470.86 ; C15.1@2530,133.5 C15.1 2531.5,76.5 2515,60 2235,60 2221.26,73.74 ; 2555.19,1166.5 cw(c2555.19,1140.19) v1@2573.79,1158.79 ; 2562.42,1166.5 ccw(c2562.42,1182.58) v1@2573.79,1171.21 ; v1(2755,1225) 2760,1220 2825,1220 ; v1@2761.21,1231.21 ccw(c2788.27,1258.27) 2788.27,1220 ; C5.1 2825,1220 ; C6.1 2825,1220 ; v1@3063.79,951.21 ccw(c3048.8,966.2) 3070,966.2 ccw(c3091.2,966.2) v1@3076.21,951.21 ; v1(3070,945) C16.1 ; v1(3095,1380) 3130,1380 3200,1310 U3.4 ; v1@3101.21,1373.79 cw(c3116.2,1358.8) 3116.2,1380 cw(c3116.2,1401.2) v1@3101.21,1386.21 ; 2221.26,73.74 SW3.1@2221.26,137.05
  Top Layer w20: v2(3095,2020) v2@3098.46,2016.54
  Top Layer w30: v2(420,1000) 550,1000 575,1025 F1.1
  Top Layer w50: C2.1 100,820 ; 206.21,821.21 cw(c155,872.43) v2(155,800) ; R3.1 210,825 185,800 v2(155,800) ; 100,820 ccw(c148.93,868.92) v2(155,800) ; 100,820 120,800 v2(155,800)
  Bottom Layer w10: 600,2175 603.43,2171.57 CON2.3 603.43,1991.57 ; CON1.2 770,1175 800,1145 1030,1145 ; CON1.10 770,1805 780,1815 ; SW1.1@1203.92,174.08 ccw(c1162.05,215.95) 1221.26,215.95 ccw(c1280.47,215.95) SW1.1@1238.6,174.08 ; SW1.1@1203.92,355.92 cw(c1165.09,317.09) 1220,317.09 ; SW1.1@1210.99,167 ccw(c1186.19,191.8) 1221.26,191.8 ccw(c1256.33,191.8) SW1.1@1231.53,167 ; SW1.1@1210.99,363 cw(c1189.23,341.24) 1220,341.24 ; 1220,311.01 cw(c1283.52,311.01) SW1.1@1238.6,355.92 ; 1220,335.15 cw(c1259.37,335.15) SW1.1@1231.53,363 ; SW1.1@1221.26,137.05 1221.26,263.74 1220,265 1220,391.69 SW1.1@1221.26,392.95 ; 1410,1800 1415.47,1805.47 LCD1.1 1415.47,2075.47 1445,2105 ; SW2.1@1703.92,174.08 ccw(c1662.05,215.95) 1721.26,215.95 ccw(c1780.47,215.95) SW2.1@1738.6,174.08 ; SW2.1@1703.92,355.92 cw(c1665.09,317.09) 1720,317.09 ; SW2.1@1710.99,167 ccw(c1686.19,191.8) 1721.26,191.8 ccw(c1756.33,191.8) SW2.1@1731.53,167 ; SW2.1@1710.99,363 cw(c1689.23,341.24) 1720,341.24 ; 1720,311.01 cw(c1783.52,311.01) SW2.1@1738.6,355.92 ; 1720,335.15 cw(c1759.37,335.15) SW2.1@1731.53,363 ; SW2.1@1721.26,137.05 1721.26,263.74 1720,265 1720,391.69 SW2.1@1721.26,392.95 ; VR1.1 1869.92,2105.08 1870,2105 ; v1@1973.79,788.79 cw(c1958.8,773.8) 1980,773.8 cw(c2001.2,773.8) v1@1986.21,788.79 ; 1980,710 v1(1980,795) ; SW3.1@2203.92,174.08 ccw(c2162.05,215.95) 2221.26,215.95 ccw(c2280.47,215.95) SW3.1@2238.6,174.08 ; SW3.1@2203.92,355.92 cw(c2165.09,317.09) 2220,317.09 ; SW3.1@2210.99,167 ccw(c2186.19,191.8) 2221.26,191.8 ccw(c2256.33,191.8) SW3.1@2231.53,167 ; SW3.1@2210.99,363 cw(c2189.23,341.24) 2220,341.24 ; 2220,311.01 cw(c2283.52,311.01) SW3.1@2238.6,355.92 ; 2220,335.15 cw(c2259.37,335.15) SW3.1@2231.53,363 ; SW3.1@2221.26,137.05 2221.26,263.74 2220,265 2220,391.69 SW3.1@2221.26,392.95 ; 2915,2105 2915.47,2104.53 LCD1.16
  Bottom Layer w50: v2(155,800) 418.39,800 ; 600,2175 600,2245 670,2315 1000,2315 1030,2285 v1(1030,2215) 1030,1820 ; 603.43,1991.57 605,1990 485,1990 418.39,1923.39 J2.3 418.39,800 ; 780,1815 v1(805,1815) 1025,1815 1030,1820 ; BT1.2 922.99,267.99 920,265 ; 1410,1800 1654.22,1555.78 v1(1654.22,1415) 1654.22,1120 ; 1445,2105 1870,2105 v1(2105,2105) 2915,2105 3010,2105 v2(3095,2020) v1(3095,1380) 3095,1195 3170,1120 3170,975 3140,945 v1(3070,945) 2855,945 2755,1045 ; v1(1705,1120) 1654.22,1120 ; 1980,710 1795,710 1655,850 ; 2220,265 1720,265 1220,265 920,265 ; v1(2465,1470) 2580,1355 v1(2580,1165) 2580,1085 2620,1045 2755,1045 ; v1(2755,1225) 2755,1045 ; 418.39,800 418.39,476.61 630,265 920,265 ; 1030,1820 1030,1145 1030,1055 1235,850 1655,850 ; 1654.22,1120 1654.22,850.78 1655,850
  other v1: 335,90 3065,165 3590,185 524.19,370.81 2510,645 3570,685 1135,950 1030,1060 3350,1110 2065,1185 2200,1300 2070,1395 1525,1685 3735,1695
L_LED: D5.2 U1.11 | length 1585.9
  Top Layer w10: U1.11 2288.07,1030 2385,1030 3170,245 D5.2 ; D5.2@3349.87,224.87 ccw(c3301.28,176.28) 3301.28,245 ccw(c3301.28,313.72) D5.2@3349.87,265.13 ; D5.2@3356.94,231.94 ccw(c3325.42,200.42) 3325.42,245 ccw(c3325.42,289.58) D5.2@3356.94,258.06
LCD_BL: Q5.2 R15.1 U1.22 | length 630.9
  Top Layer w10: U1.22 2537.48,1412.48 2765,1640 2815.91,1640 2816.54,1639.37 ; Q5.2 2816.54,1673.74 2816.54,1639.37 ; R15.1 2816.54,1639.37
LCD_D4: LCD1.11 U1.28 | length 764.2
  Top Layer w10: U1.28 2130,1527 2122,1535 2122,1847 2160,1885 2405,1885 2415.47,1895.47 ; LCD1.11@2405.03,1911.91 cw(c2397.31,1895.47) 2415.47,1895.47 ; LCD1.11 2415.47,1895.47 ; LCD1.11@2425.9,1911.91 ccw(c2433.63,1895.47) 2415.47,1895.47
LCD_D5: LCD1.12 U1.27 | length 848.9
  Top Layer w10: U1.27 2161.5,1526.01 2140,1547.5 2140,1840.96 2167.04,1868 2412.04,1868 2429.04,1885 2505,1885 2515.47,1895.47 ; LCD1.12@2505.03,1911.91 cw(c2497.31,1895.47) 2515.47,1895.47 ; LCD1.12@2515,1933.63 LCD1.12 2515.47,1895.47 ; LCD1.12@2525.9,1911.91 ccw(c2533.63,1895.47) 2515.47,1895.47
LCD_D6: LCD1.13 U1.26 | length 915.4
  Top Layer w10: U1.26 2192.99,1525.5 2160,1558.5 2160,1836.92 2174.08,1851 2419.08,1851 2436.08,1868 2512.04,1868 2529.04,1885 2600.47,1885 2615.47,1900 ; LCD1.13@2607.67,1910.85 cw(c2604.03,1900) 2615.47,1900 ; LCD1.13 2615.47,1900 ; LCD1.13@2623.27,1910.85 ccw(c2626.91,1900) 2615.47,1900
LCD_D7: LCD1.14 U1.25 | length 993.5
  Top Layer w10: U1.25 2224.49,1518.05 2177,1565.54 2177,1821 2190,1834 2426.12,1834 2443.12,1851 2519.08,1851 2536.08,1868 2607.51,1868 2624.51,1885 2700,1885 2715.47,1900.47 ; LCD1.14@2707.97,1910.75 cw(c2704.67,1900.47) 2715.47,1900.47 ; LCD1.14 2715.47,1900.47 ; LCD1.14@2722.97,1910.75 ccw(c2726.27,1900.47) 2715.47,1900.47
LCD_EN: LCD1.6 U1.29 | length 663.3
  Top Layer w10: LCD1.6@1904.56,1912.14 cw(c1895.81,1894.53) 1915.47,1894.53 ; LCD1.6 1915.47,1894.53 ; LCD1.6@1926.38,1912.14 ccw(c1935.13,1894.53) 1915.47,1894.53 ; U1.29 2098.5,1523.05 2105,1529.55 2105,1848.08 2068.08,1885 1925,1885 1915.47,1894.53
LCD_RS: LCD1.4 U1.31 | length 831.3
  Top Layer w10: LCD1.4@1704.56,1912.14 cw(c1695.81,1894.53) 1715.47,1894.53 ; LCD1.4@1715,1933.63 LCD1.4 1715.47,1894.53 ; LCD1.4@1726.38,1912.14 ccw(c1735.13,1894.53) 1715.47,1894.53 ; U1.31 2035.51,1523.05 2068,1555.54 2068,1837 2054,1851 1910.92,1851 1895.96,1865.96 1820,1865.96 1800.96,1885 1725,1885 1715.47,1894.53
LCD_RW: LCD1.5 U1.30 | length 746.4
  Top Layer w10: LCD1.5@1804.56,1912.14 cw(c1795.81,1894.53) 1815.47,1894.53 ; LCD1.5@1815,1933.63 LCD1.5 1815.47,1894.53 ; LCD1.5@1826.38,1912.14 ccw(c1835.13,1894.53) 1815.47,1894.53 ; U1.30 2067.01,1530.5 2085,1548.5 2085,1844.04 2061.04,1868 1917.96,1868 1900.96,1885 1825,1885 1815.47,1894.53
NetC3_2: C3.2 U1.6 | length 123.6
  Top Layer w10: U1.6 2130,980 2161.5,948.5 C3.2
NetC5_2: C5.2 U1.16 Y1.2 | length 869.8
  Top Layer w10: U1.16 2405.5,1223.5 2420,1238 2617,1238 2680,1175 ; Y1.2@2664.75,1145.6 ccw(c2644.05,1175) 2680,1175 ; Y1.2@2670.5,1137.43 ccw(c2657.62,1155.73) 2680,1155.73 ccw(c2702.38,1155.73) Y1.2@2689.5,1137.43 ; Y1.2@2684.59,1128.53 ccw(c2720.87,1164.81) 2720.87,1113.5 ; Y1.2@2691.66,1135.6 ccw(c2745.01,1188.95) 2745.01,1113.5 ; Y1.2@2695.25,1145.6 cw(c2715.95,1175) 2680,1175 ; Y1.2@2698.74,1105.2 cw(c2718.78,1085.16) 2718.78,1113.5 ; Y1.2@2698.74,1142.67 ccw(c2769.15,1213.09) 2769.15,1113.5 ; C5.2 2690.43,1113.5 Y1.2 2680,1175
NetC6_2: C6.2 U1.17 Y1.1 | length 863.3
  Top Layer w10: U1.17 2618.94,1255 Y1.1 2690.43,1326.5 C6.2 ; Y1.1@2653.5,1316.06 cw(c2589.54,1316.06) 2634.77,1270.83 cw(c2680,1225.6) Y1.1@2680,1289.57 ; Y1.1@2663.5,1316.06 cw(c2623.68,1316.06) 2651.84,1287.9 cw(c2680,1259.74) Y1.1@2680,1299.57 ; Y1.1@2684.59,1311.47 cw(c2720.87,1275.19) 2720.87,1326.5 ; Y1.1@2691.66,1304.4 cw(c2745.01,1251.05) 2745.01,1326.5 ; Y1.1@2698.74,1297.33 cw(c2769.15,1226.91) 2769.15,1326.5 ; Y1.1@2698.74,1334.8 ccw(c2718.78,1354.84) 2718.78,1326.5
NetD1_2: D1.2 J1.2 R1.1 | length 394.6
  Top Layer w10: J1.2 448.5,1333.5 450,1335 ; D1.2 465,1270 450,1285 450,1335 ; R1.1 465,1475 450,1460 450,1335
NetD2_2: D2.2 J1.3 R2.1 | length 434.5
  Top Layer w10: J1.3 402.99,1302.01 465,1240 560,1240 565,1245 D2.2 565,1300 555,1310 515,1310 496.54,1328.46 R2.1
NetD3_1: D3.1 R9.1 | length 318.9
  Top Layer w10: R9.1 3766.54,168.46 3795,140 ; 3813.35,140 cw(c3813.35,88.35) D3.1@3849.87,124.87 ; 3817.41,140 ccw(c3817.41,192.19) D3.1@3856.26,157.33 ; D3.1@3848.82,164.01 cw(c3795,212.31) 3795,140 ; D3.1 3865,140 3795,140
NetD4_1: D4.1 R10.1 | length 347.7
  Top Layer w10: R10.1 2761.54,168.46 2785,145 D4.1 ; D4.1@2849.87,124.87 ccw(c2801.28,76.28) 2801.28,145 ccw(c2801.28,213.72) D4.1@2849.87,165.13 ; D4.1@2856.94,131.94 ccw(c2825.42,100.42) 2825.42,145 ccw(c2825.42,189.58) D4.1@2856.94,158.06
NetD5_1: D5.1 R11.1 | length 330.2
  Top Layer w10: R11.1 3256.54,168.46 3285,140 3365,140 D5.1 ; 3289.21,140 ccw(c3289.21,225.79) D5.1@3349.87,165.13 ; D5.1@3349.87,124.87 ccw(c3313.35,88.35) 3313.35,140 ccw(c3313.35,201.65) D5.1@3356.94,158.06
NetLCD1_3: LCD1.3 VR1.2 | length 259.8
  Top Layer w10: VR1.2 1615.47,2129.45 LCD1.3
NetLCD1_15: LCD1.15 R12.1 | length 99.5
  Top Layer w10: R12.1@2815.47,1836.07 R12.1
  Top Layer w15: R12.1@2815.47,1836.07 LCD1.15
NetQ5_1: Q5.1 R12.2 | length 99.6
  Top Layer w20: Q5.1 2872.32,1762.32 2883.46,1773.46 R12.2
NetR1_2: R1.2 U1.3 | length 2245
  Top Layer w10: R1.2 668,1475 683,1460 683,1212.96 722.96,1173 917.04,1173 986.04,1242 1608.96,1242 1638,1212.96 1638,1077.96 1682.96,1033 1892,1033 ; v1@1896.27,1020.93 ccw(c1881.49,1022.49) 1892,1033 ; v1@1904.07,1028.73 cw(c1902.51,1043.51) 1892,1033 ; v1(1905,1020) 1892,1033 ; U1.3 2035.51,1090.51 v1(2045,1100) ; U1.3@2035.51,1055.9 cw(c2089.1,1055.9) v1@2051.21,1093.79 ; 2035.51,1080.04 cw(c2064.96,1080.04) v1@2044.14,1100.86
  Bottom Layer w10: v1(1905,1020) 2015,1020 2045,1050 v1(2045,1100) ; v1@1911.21,1013.79 cw(c1926.2,998.8) 1926.2,1020 cw(c1926.2,1041.2) v1@1911.21,1026.21 ; v1@2038.79,1093.79 cw(c2023.8,1078.8) 2045,1078.8 cw(c2066.2,1078.8) v1@2051.21,1093.79
NetR2_2: R2.2 U1.4 | length 2195.7
  Top Layer w10: R2.2 646,1370 666,1350 666,1205.92 715.92,1156 924.08,1156 993.08,1225 1601.92,1225 1621,1205.92 1621,1070.92 1675.92,1016 1854,1016 v1(1870,1000) ; v1@1861.22,1000 ccw(c1840.02,1000) 1855.01,1014.99 ccw(c1870,1029.98) v1@1870,1008.78 ; U1.4 2067.01,1077.01 v1(2090,1100) ; v1@2081.22,1100 cw(c2060.02,1100) 2075.01,1085.01 cw(c2090,1070.02) v1@2090,1091.22
  Bottom Layer w10: v1(1870,1000) 1875.78,994.22 2049.22,994.22 2090,1035 v1(2090,1100) ; v1@1876.21,1006.21 ccw(c1905.15,1035.15) 1905.15,994.22 ; v1@2083.79,1093.79 cw(c2068.8,1078.8) 2090,1078.8 cw(c2111.2,1078.8) v1@2096.21,1093.79
NetU3_1: U3.1 Y2.1 | length 358.9
  Top Layer w10: U3.1 3453.94,1160 ; Y2.1@3463.9,1128.5 ccw(c3428.6,1134.66) 3453.94,1160 ; Y2.1@3473.75,1126.78 ccw(c3451.77,1130.61) 3467.55,1146.39 ccw(c3483.32,1162.16) Y2.1@3487.16,1140.19 ; Y2.1@3485.44,1150.04 cw(c3479.28,1185.33) 3453.94,1160 ; Y2.1 3453.94,1160
NetU3_2: U3.2 Y2.2 | length 478.1
  Top Layer w10: U3.2 3450,1210 3490,1250 Y2.2 ; Y2.2@3471.26,1297.33 cw(c3426.03,1252.1) 3490,1252.1 cw(c3553.97,1252.1) Y2.2@3508.74,1297.33 ; Y2.2@3478.34,1304.4 cw(c3450.18,1276.24) 3490,1276.24 cw(c3529.82,1276.24) Y2.2@3501.66,1304.4
RX_LED: D4.2 U1.8 | length 1370.5
  Top Layer w10: U1.8 2192.99,982.01 2205,970 2420.96,970 2870,520.96 D4.2 ; D4.2@2849.87,265.13 ccw(c2801.28,313.72) 2870,313.72 ccw(c2938.72,313.72) D4.2@2890.13,265.13 ; D4.2@2856.94,258.06 ccw(c2825.42,289.58) 2870,289.58 ccw(c2914.58,289.58) D4.2@2883.06,258.06
SCL: R14.1 U1.18 U3.6 | length 913.7
  Top Layer w10: U1.18 2405.5,1286.5 2420,1300.99 2535.03,1300.99 2619.04,1385 2890,1385 2910,1365 2910,1260 ; R14.1 2910,1260 ; U3.6 2910,1260
SDA: R13.1 U1.19 U3.5 | length 822.5
  Top Layer w10: U1.19 2527.99,1317.99 2612,1402 2908,1402 2985,1325 ; R13.1 2985,1325 ; U3.5 3030,1310 3015,1325 2985,1325
SHIELD: C2.2 J1.6 J1.7 J1.8 J1.9 R3.2 | length 834.1
  Top Layer w50: 155,1002.09 155,1094.45 J1.9 ; v2(168.66,1173.66) J1.9 ; v2(168.66,1411.34) J1.7 J1.6 ; J1.8 J1.9
  Bottom Layer w50: v2(168.66,1173.66) v2(168.66,1411.34)
TCK: CON1.1 U1.39 | length 1053
  Top Layer w10: CON1.1 920,1255 941,1276 1819.96,1276 1840.96,1255 U1.39
TDI: CON1.9 U1.36 | length 1403.8
  Top Layer w10: CON1.9 830,1655 820,1645 820,1525 840,1505 895,1505 925,1475 925,1385 983,1327 1817.96,1327 1840.45,1349.49 U1.36
TDO: CON1.3 U1.37 | length 1057.5
  Top Layer w10: CON1.3 915,1355 960,1310 1825,1310 1832.99,1317.99 U1.37
TMS: CON1.5 U1.38 | length 1252.3
  Top Layer w10: CON1.5 820,1405 820,1325 840,1305 928,1305 940,1293 1827,1293 1833.5,1286.5 U1.38
TX_LED: D3.2 U1.12 | length 2085.3
  Top Layer w10: U1.12 2407.48,1097.52 2420,1085 2420,1019.04 3134.04,305 3810,305 D3.2 ; D3.2@3841.54,245 ccw(c3772.82,245) 3821.41,293.59 ccw(c3870,342.18) D3.2@3870,273.46 ; D3.2@3851.54,245 ccw(c3806.96,245) 3838.48,276.52 ccw(c3870,308.04) D3.2@3870,263.46
UGND: C3.1 C12.1 D1.1 D2.1 F1.2 J1.5 U1.5 | length 2616.3
  Top Layer w10: v2@2045.55,889.98 ccw(c2048.24,938.62) C3.1@2082.68,904.18 ; v2@2046.1,899.97 ccw(c2049.9,968.6) C3.1 2058.5,880 v2(2045,880) 2075,850 ; v2@2046.91,860.09 cw(c2050.25,825.26) 2075,850 ; v2@2064.91,878.09 ccw(c2099.74,874.75) 2075,850 ; v2@2065,880 cw(c2080.68,880) 2069.59,891.09 ; C12.1 2075,850
  Top Layer w20: J1.5 400.98,1239.02 410,1230
  Top Layer w23: v2@2035.45,889.55 ccw(c2000.34,924.66) 2050,924.66 ; v2(2045,880) 2050,885 2050,935 2098.5,983.5 U1.5
  Top Layer w30: 495,1155 D1.1 ; 565,1160 D2.1
  Top Layer w40: 410,1230 435,1205 435,1180 460,1155 495,1155 ; F1.2 485,1145 495,1155 ; 565,1160 570,1155 ; v2(1805,890) 905,890 640,1155 570,1155 ; 495,1155 570,1155
  Bottom Layer w40: v2(1805,890) 2035,890 v2(2045,880) ; 2008.79,890 cw(c2008.79,843.79) v2@2041.46,876.46
VBAT: BT1.1 U3.3 | length 6431.1
  Top Layer w20: BT1.1@97.36,580 cw(c26.46,580) 76.59,529.86 cw(c126.73,479.72) BT1.1@126.73,550.63 ; BT1.1 55,508.27 55,415 90,380 175,380 530,25 3935,25 4010,100 4010,980 3935,1055 3260,1055 3165,1150 3165,1225 3200,1260 U3.3
VUSB: C12.2 J1.1 U1.7 | length 3446.5
  Top Layer w10: J1.1 265,1365 30,1130 30,790 72.5,747.5 1087.5,747.5 1170,830 v1(1760,830) v1@1765,830 ; v1@1753.79,823.79 ccw(c1738.8,808.8) 1738.8,830 ccw(c1738.8,851.2) v1@1753.79,836.21 ; v1@1870,821.22 cw(c1870,800.02) 1884.99,815.01 cw(c1899.98,830) v1@1878.78,830 ; v1(1870,830) 1950,750 2135,750 2205,820 2205,850 ; C12.2 2205,850 ; U1.7 2161.5,978.5 2205,935 2205,850
  Bottom Layer w10: v1(1760,830) v1(1870,830) v1@1875,830 ; v1@1766.21,823.79 cw(c1781.2,808.8) 1781.2,830 cw(c1781.2,851.2) v1@1766.21,836.21 ; v1@1863.79,823.79 ccw(c1848.8,808.8) 1848.8,830 ccw(c1848.8,851.2) v1@1863.79,836.21
pads on no net: CON1.7 CON1.8 HOLE1.0 HOLE2.0 HOLE3.0 HOLE4.0 J1.4 J1.X J1.Y LCD1.0 LCD1.7 LCD1.8 LCD1.9 LCD1.10 U1.9 U1.10 U1.32 U1.33 U1.41 U2.1 U2.2 U2.6 U2.7 U2.8 U3.7

## Polygon pours and split planes (outlines as drawn)
GND on Bottom Layer "GND_BOT" (solid, remove dead copper, pour order 4): 0,2362.21 0,2362.2 0,0 4330.71,0 4330.71,2362.2 0,2362.2 0,2362.21
GND on Top Layer "GND_TOP" (solid, remove dead copper, pour order 2): 0,2362.2 0,0 4330.71,0 4330,0.71 4330,2362.2 0,2362.2 0,2362.21

## Keep-outs
Keep-Out Layer:
  the board outline again, w8

## Dimensions
0,2362.2 to 0,0 on Mechanical 15
0,2362.2 to 4330.71,2362.2 on Mechanical 15

## Text inside footprints (layer, text, board x,y; h text height)
CON1: Top Overlay "2" at 799.53,1168.4 h25 r90; Top Overlay "1" at 899.53,1188.08 h25 r90; Top Overlay "10" at 799.53,1702.24 h25 r90; Top Overlay "9" at 899.53,1702.24 h25 r90